# Altium PCB PCB1.PcbDoc
Units mm, origin at the board's own origin, x right, y up, seen from the top; angles counter-clockwise.
Board outline 100 x 50 mm, 2 copper layers (Top Layer, Bottom Layer), stack 1.98 mm thick; 9 components, 16 nets, 41 pads, 0 vias.
Unrouted connection lines stored in the file: 18.
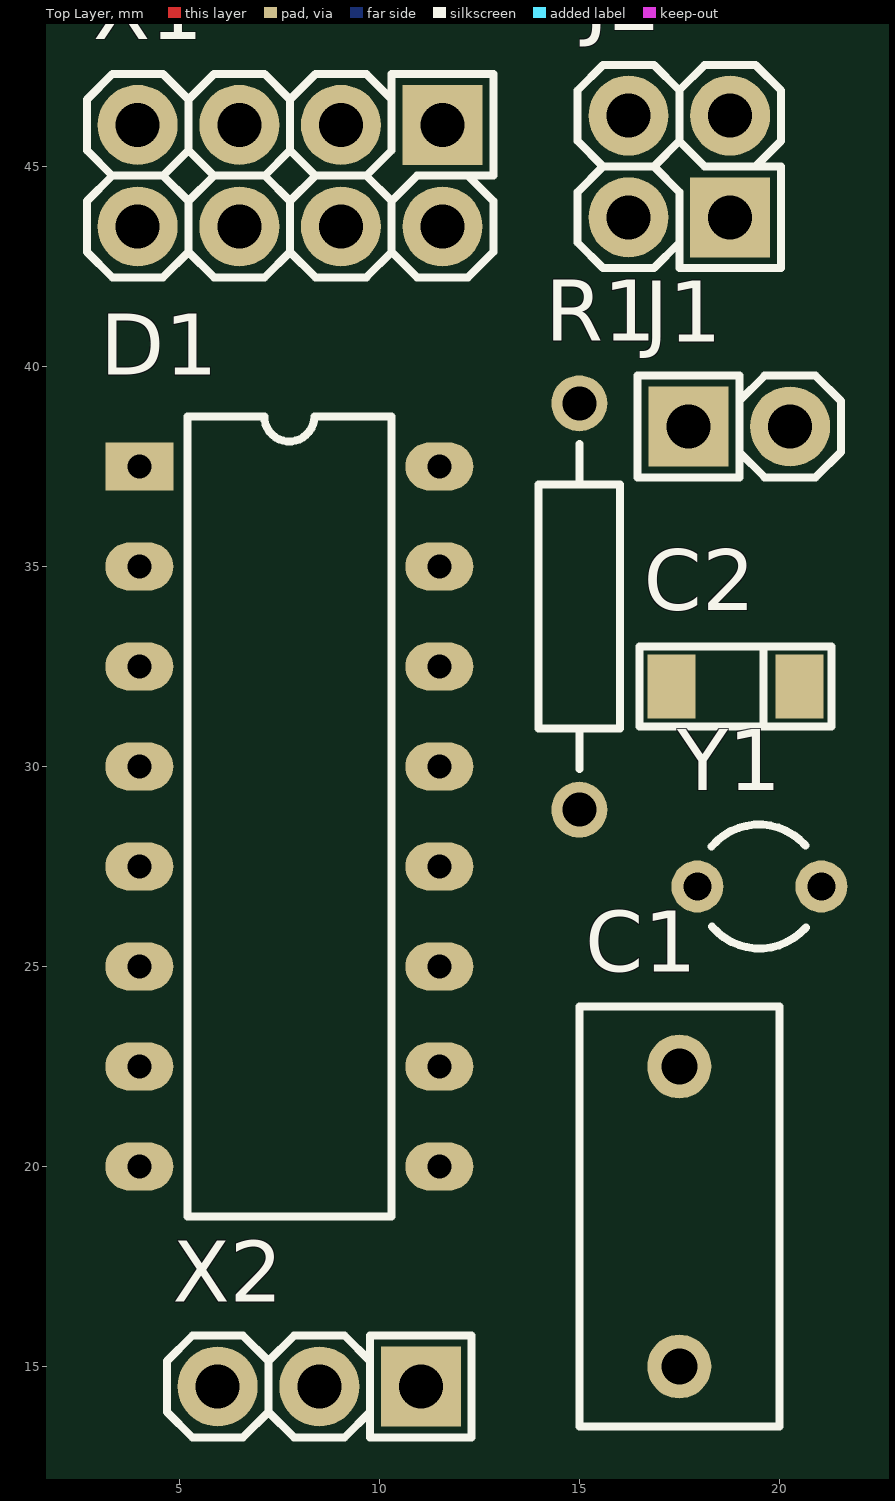
[diagram p0: Top Layer view]
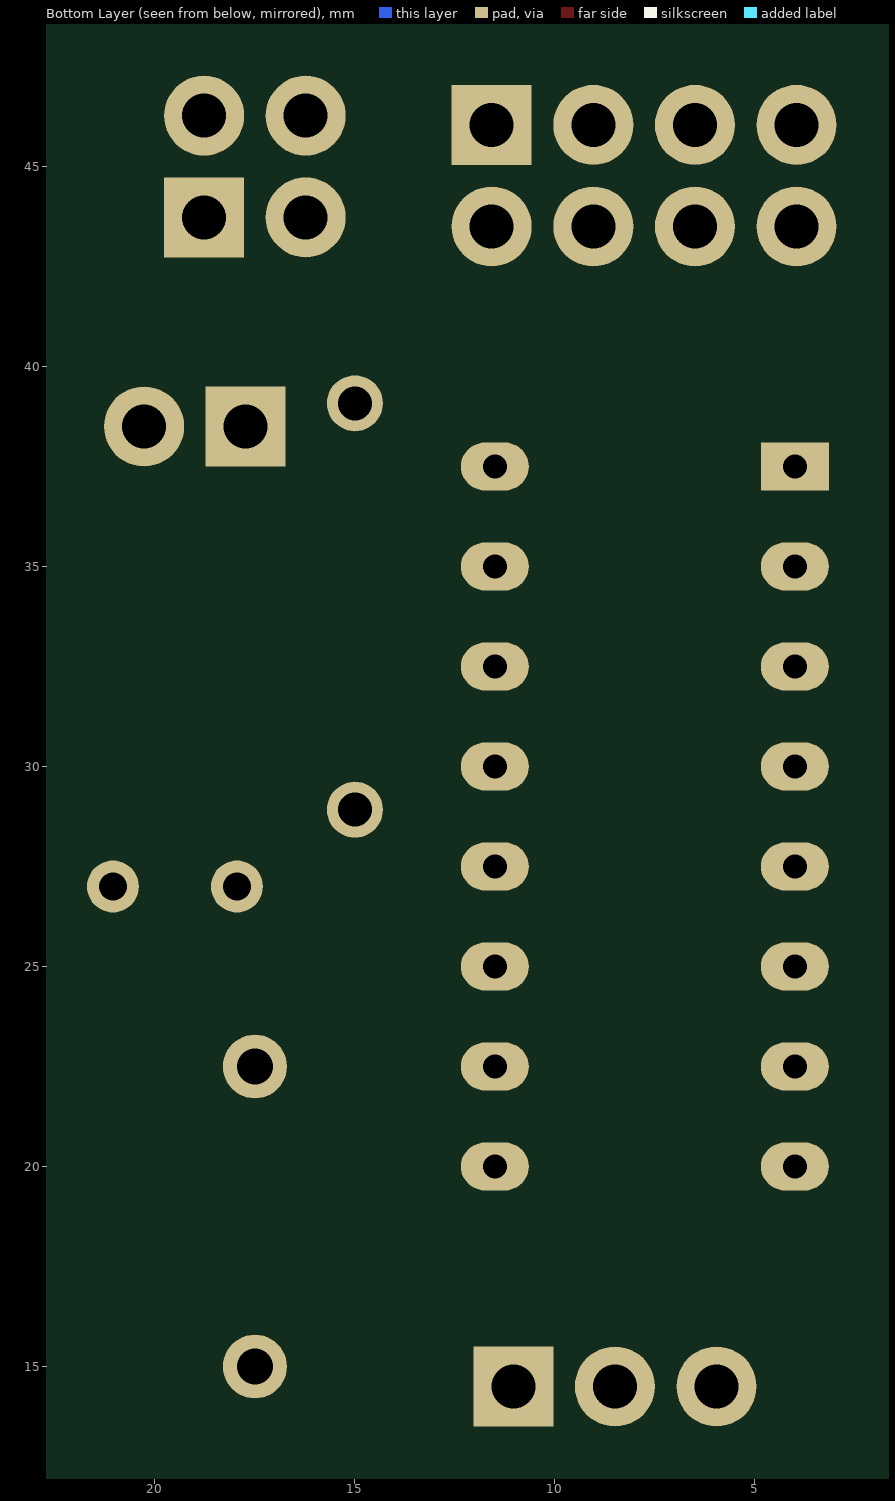
[diagram p1: Bottom Layer view, seen from below]

## Layer stack, top to bottom
Top Solder: solder mask 0.0102, Solder Resist, Dk 3.5
Top Layer: signal copper 0.072
Dielectric 1: dielectric 1.836, FR-4, Dk 4.8
Bottom Layer: signal copper 0.072
Bottom Solder: solder mask 0.0102, Solder Resist, Dk 3.5

## Board outline
0,0 100,0 100,50 0,50

## Design rules (kind name [scope] priority, off if disabled: settings)
Clearance [All] p1: gap=0.254 ignorepadtopadclearanceinfootprint=FALSE except(0: Arc-Hole Track-Hole SMDPad-Hole THPad-Hole Via-Hole Fill-Hole Poly-Hole Region-Hole Text-Hole)
PolygonConnect [All] p1: connectstyle=Relief reliefconductorwidth=0.254 reliefentries=4 polygonreliefangle="90 Angle" airgapwidth=0.254
RoomDefinition Schema [InComponentClass('Schema')] p1: confinementstyle=ConfineIn formatcopy=TRUE lockcomponents=FALSE outline -125,-125 -74.2,-125 -74.2,-99.6 -125,-99.6
RoutingVias [All] p1: holewidth=0.711 width=1.27 viastyle="Through Hole" minholewidth=0.711 minwidth=1.27 maxholewidth=0.711 maxwidth=1.27
SolderMaskExpansion [All] p1: expansion=0.102 istentingtop=FALSE
Width [All] p1: maxlimit=0.254 minlimit=0.254 preferedwidth=0.254
30 further rules are at their usual default settings.

## Classes and differential pairs
net class POWER[1..3]: POWER1 POWER2 POWER3

## Components (designator, comment, footprint, x,y, rotation, side; value= is the part's Value field where it differs from the comment)
C1 "#NAME?" "CAP: VY2" 17.5,22.5 r270 top value=10μF
C2 "#NAME?" "CAP: TANTAL-A" 18.9,32 r180 top value=100μF
D1 "КР580ГФ24" DIP16 4,37.5 r0 top
J1 "=Valuemanufacturerpartnumber" "CON: PLS-2" 19,38.5 r0 top
J2 "=Valuemanufacturerpartnumber" "CON: PLD-4" 17.5,45 r90 top
R1 "Res2" AXIAL-0.4 15,34 r90 top value=100K
X1 "#NAME?" "CON: PLD-8" 7.77,44.77 r180 top
X2 "#NAME?" "CON: PLS-3" 8.5,14.5 r180 top
Y1 "10MHz" R38 19.5,27 r270 top

## Footprints (in the part's own frame and the unit in brackets; to place one, negate y for a bottom-side part, rotate by r counter-clockwise, add the part's x,y. Pads: shape width x height; smd on the part's side, far side on the other; paste and mask are expansions set on the pad)
AXIAL-0.4 [mm] "Axial Device, Thru-Hole; 2 Leads; 0.4 in Pin Spacing"
  round 1.4 hole 0.85: 1(-5.08,0) 2(5.08,0)
  silkscreen extent -4.06,-1.02 4.06,1.02
"CAP: TANTAL-A" [mm]
  rect 1.2x1.6 smd: 1(-1.6,0) 2(1.6,0)
  silkscreen extent -2.4,-1 2.4,1, body extent -1.7,-0.84 1.7,0.84, height 1.71
"CAP: VY2" [mm]
  round 1.6 hole 0.9: 1(0,0) 2(7.5,0)
  silkscreen extent -1.5,-2.5 9,2.5, body extent -1.5,-2.5 9,2.5, height 14.75
"CON: PLD-4" [mm]
  rect 2x2 hole 1.1: 1(-1.27,-1.27)
  round 2 hole 1.1: 2(-1.27,1.27) 3(1.27,-1.27) 4(1.27,1.27)
  silkscreen extent -2.54,-2.54 2.54,2.54, body extent -2.59,-2.55 2.49,2.53, height 8.54
"CON: PLD-8" [mm] "PLD-40 8 pin header"
  rect 2x2 hole 1.1: 1(-3.81,-1.27)
  round 2 hole 1.1: 2(-3.81,1.27) 3(-1.27,-1.27) 4(-1.27,1.27) 5(1.27,-1.27) 6(1.27,1.27) 7(3.81,-1.27) 8(3.81,1.27)
  silkscreen extent -5.08,-2.54 5.08,2.54, body extent -5.13,-2.55 5.03,2.53, height 8.54
"CON: PLS-2" [mm]
  rect 2x2 hole 1.1: 1(-1.27,0)
  round 2 hole 1.1: 2(1.27,0)
  silkscreen extent -2.54,-1.27 2.54,1.27, body extent -2.57,-1.28 2.51,1.26, height 8.54
"CON: PLS-3" [mm]
  rect 2x2 hole 1.1: 1(-2.54,0)
  round 2 hole 1.1: 2(0,0) 3(2.54,0)
  silkscreen extent -3.81,-1.27 3.81,1.27, body extent -3.81,-1.27 3.81,1.27, height 8.54
DIP16 [mm]
  rect 1.7x1.2 hole 0.6: 1(0,0)
  oval 1.7x1.2 hole 0.6: 2(0,-2.5) 3(0,-5) 4(0,-7.5) 5(0,-10) 6(0,-12.5) 7(0,-15) 8(0,-17.5) 9(7.5,-17.5) 10(7.5,-15) 11(7.5,-12.5) 12(7.5,-10) 13(7.5,-7.5) 14(7.5,-5) 15(7.5,-2.5) 16(7.5,0)
  silkscreen extent 1.2,-18.75 6.3,1.25, body extent -0.14,-18.4 7.74,1, height 4.66
R38 [mm] "Crystal, Thru-Hole; 2 Leads; Body 3.1 x 8.2 mm (Dia.xH)"
  round 1.3 hole 0.7: 1(0,1.55) 2(0,-1.55)
  silkscreen extent -1.55,-1.19 1.55,1.17

## Part data
C1: library part Film, Manufacturer=Epcos, Package="31.5x15 mm", PartNumber=B32774D4106K000, Temperature=-40...+105°C, Tolerance=±10%, TypeCapacitor="Film capacitor", Voltage=6VDC, HelpURL=https://www.digikey.com/products/en/capacitors/film-capacitors/62?k=&pkeyword=&sv=0&pv2097=1958&sf=0&FV=fffc01ef%2C1f140000%2Cffe0003e%2Cffec6366&quantity=1&ColumnSort=1000011&page=1&stock=1&pageSize=25, Impedance=10.9mOhm, ValueManufacturerPartNumber=#NAME?
C2: library part Tantal_A, Manufacturer=AVX, Package="case A (3216)", PartNumber=F930J107KAAAJ6, Temperature=-55...+125°C, Tolerance=±10%, TypeCapacitor="Tantalum capacitor", TypeDielectric=X7R, Voltage=6.3V, HelpURL=https://www.digikey.com/product-detail/en/avx-corporation/F930J107KAAAJ6/478-12404-1-ND/9645231, Impedance=2Ohm, ValueManufacturerPartNumber=#NAME?
D1: "Генератор тактовых сигналов", Case=DIP16, Manufacture=Гамма, HelpURL=https://www.chipdip.ru/product0/27661, Model=КР580ГФ24
J1: library part Jumper_single, CommentText="\"Сброс\""
J2: library part Jumper_double, CommentText="\"Перемычка\""
R1: "Resistor", LatestRevisionDate=17-Jul-2002, LatestRevisionNote="Re-released for DXP Platform.", PackageDescription="Axial Device, Thru-Hole; 2 Leads; 0.4 in Pin Spacing", PackageReference=AXIAL-0.4, Published=8-Jun-2000, Publisher="Altium Limited"
X1: library part PLD-8, CurrentMax=3A, Manufacturer=Connfly, VoltageMax=500VAC, CommentText="\"Разъем\"", HelpURL=https://www.chipdip.ru/product/pld-8-ds1021-2x4, Multichannel=8pin, PartNumber=PLD-8, Pitch=2.54mm, TypeConnector=Connector, ValueManufacturerPartNumber=#NAME?
X2: library part PLS-3, CurrentMax=3A, Manufacturer=Connfly, VoltageMax=500VAC, CommentText="\"Разъем\"", HelpURL=https://www.chipdip.ru/product/pls-3, Multichannel=3pin, PartNumber=PLS-3, Pitch=2.54mm, TypeConnector=Connector, ValueManufacturerPartNumber=#NAME?
Y1: library part XTAL, "Crystal Oscillator", LatestRevisionDate=17-Jul-2002, LatestRevisionNote="Re-released for DXP Platform.", PackageDescription="Crystal, Thru-Hole; 2 Leads; Body 3.1 x 8.2 mm (Dia.xH)", PackageReference=R38, Published=8-Jun-2000, Publisher="Altium Limited"

## Nets (pads, with @x,y where several pads share a name; then routed paths per layer and width w, separated by ;. In a path a pad name is that pad's centre, name@x,y a point inside that pad or via, vN(x,y) a via of type N, cw(c..) or ccw(c..) an arc to the next point about the centre after c; other vN are vias at no path point)
+5: D1.16 R1.2
+12: D1.9
GND: C2.2 D1.8 J1.1
NetC1_1: C1.1 Y1.1
NetC1_2: C1.2 D1.14
NetC2_1: C2.1 D1.2 J1.2 R1.1
NetD1_1: D1.1 X1.5
NetD1_3: D1.3 X1.7
NetD1_4: D1.4 X1.4
NetD1_5: D1.5 X1.6
NetD1_10: D1.10 X1.2
NetD1_11: D1.11 X1.1
NetD1_12: D1.12 X1.3
NetD1_15: D1.15 Y1.2
NetJ2_2: J2.2 X2.1
NetJ2_4: J2.4 X2.2
pads on no net: D1.6 D1.7 D1.13 J2.1 J2.3 X1.8 X2.3

## Silkscreen, mask and mechanical layers (free items; w line width, h text height)
Border:
  the board outline again, w0.2

## Dimensions
0,0 to 0,50 on Size
0,50 to 100,50 on Size